# EAGLE board CT_schematic (EAGLE 7.6.0)

Size 100 x 80 mm. Coordinates in mm from the lower left corner, seen from the top.
Outline: 0,0 100,0 100,80 0,80 0,0
Copper layers (1*16): Top 0.035mm / dielectric 1.5mm / Bottom 0.035mm
Design rules "default": minimum track width 10mil, minimum drill 24mil, track to track 8mil, track to pad 8mil, pad to pad 8mil, via to via 8mil, smd to smd 8mil, copper to edge 40mil, drill to drill 8mil, minimum pad ring 10mil, minimum via ring 8mil, stop-mask expansion 4mil, vias tented up to drill 0mil, thermal gap 10mil

## Footprints (pad centres in the part's own frame; a part is rotated, then mirrored left to right if it is on the bottom)
C0603 = smd 0.8 x 0.8: 1 -0.762,0; 2 0.762,0
C0402 = smd 0.5 x 0.5: 1 -0.508,0; 2 0.508,0
C1210 = smd 1.2 x 2.5: 1 -1.524,0; 2 1.524,0
EXV-9H = smd 3.505 x 1.676: 1 -2.857,0; 2 2.857,0
L0603 = smd 0.8 x 0.8: 1 -0.762,0; 2 0.762,0
PJ-037B_PACKAGE = drill 3.7 square: 1 12,0 | drill 3.2 square: 2 6,0
R0603 = smd 0.8 x 0.8: 1 -0.762,0; 2 0.762,0
LQFP100 = smd 0.3 x 1.2: 1 -6,-7.75; 2 -5.5,-7.75; 3 -5,-7.75; 4 -4.5,-7.75; 5 -4,-7.75; 6 -3.5,-7.75; 7 -3,-7.75; 8 -2.5,-7.75; 9 -2,-7.75; 10 -1.5,-7.75; 11 -1,-7.75; 12 -0.5,-7.75; 13 0,-7.75; 14 0.5,-7.75; 15 1,-7.75; 16 1.5,-7.75; 17 2,-7.75; 18 2.5,-7.75; 19 3,-7.75; 20 3.5,-7.75; 21 4,-7.75; 22 4.5,-7.75; 23 5,-7.75; 24 5.5,-7.75; 25 6,-7.75; 51 6,7.75; 52 5.5,7.75; 53 5,7.75; 54 4.5,7.75; 55 4,7.75; 56 3.5,7.75; 57 3,7.75; 58 2.5,7.75; 59 2,7.75; 60 1.5,7.75; 61 1,7.75; 62 0.5,7.75; 63 0,7.75; 64 -0.5,7.75; 65 -1,7.75; 66 -1.5,7.75; 67 -2,7.75; 68 -2.5,7.75; 69 -3,7.75; 70 -3.5,7.75; 71 -4,7.75; 72 -4.5,7.75; 73 -5,7.75; 74 -5.5,7.75; 75 -6,7.75 | smd 1.2 x 0.3: 26 7.75,-6; 27 7.75,-5.5; 28 7.75,-5; 29 7.75,-4.5; 30 7.75,-4; 31 7.75,-3.5; 32 7.75,-3; 33 7.75,-2.5; 34 7.75,-2; 35 7.75,-1.5; 36 7.75,-1; 37 7.75,-0.5; 38 7.75,0; 39 7.75,0.5; 40 7.75,1; 41 7.75,1.5; 42 7.75,2; 43 7.75,2.5; 44 7.75,3; 45 7.75,3.5; 46 7.75,4; 47 7.75,4.5; 48 7.75,5; 49 7.75,5.5; 50 7.75,6; 76 -7.75,6; 77 -7.75,5.5; 78 -7.75,5; 79 -7.75,4.5; 80 -7.75,4; 81 -7.75,3.5; 82 -7.75,3; 83 -7.75,2.5; 84 -7.75,2; 85 -7.75,1.5; 86 -7.75,1; 87 -7.75,0.5; 88 -7.75,0; 89 -7.75,-0.5; 90 -7.75,-1; 91 -7.75,-1.5; 92 -7.75,-2; 93 -7.75,-2.5; 94 -7.75,-3; 95 -7.75,-3.5; 96 -7.75,-4; 97 -7.75,-4.5; 98 -7.75,-5; 99 -7.75,-5.5; 100 -7.75,-6
TST-110-05-T-D-RA = drill 1 pad 1.7 square: 1 0,0 | drill 1 pad 1.7: 2 0,2.54; 3 2.54,0; 4 2.54,2.54; 5 5.08,0; 6 5.08,2.54; 7 7.62,0; 8 7.62,2.54; 9 10.16,0; 10 10.16,2.54; 11 12.7,0; 12 12.7,2.54; 13 15.24,0; 14 15.24,2.54; 15 17.78,0; 16 17.78,2.54; 17 20.32,0; 18 20.32,2.54; 19 22.86,0; 20 22.86,2.54
DFN-10 = smd 0.965 x 0.305: 1 -1.321,1; 2 -1.321,0.5; 3 -1.321,0; 4 -1.321,-0.5; 5 -1.321,-1; 6 1.321,-1; 7 1.321,-0.5; 8 1.321,0; 9 1.321,0.5; 10 1.321,1
ASEK = smd 1.4 x 1: 1 -1.1,-0.8; 2 1.1,-0.8; 3 1.1,0.8; 4 -1.1,0.8
ASFL1 = smd 1.7 x 1.5: 1 -1.27,-1.1; 2 1.27,-1.1; 3 1.27,1.1; 4 -1.27,1.1
SOIC-8_EP = smd 1.6 x 0.533: 1 -2.921,1.905; 2 -2.921,0.635; 3 -2.921,-0.635; 4 -2.921,-1.905; 5 2.921,-1.905; 6 2.921,-0.635; 7 2.921,0.635; 8 2.921,1.905 | smd 2.54 x 3.302: EPAD 0,0 | drill 0.406 pad 0.406: P$1 -0.508,0.635; P$2 0.381,0.635; P$3 -0.508,-0.635; P$4 0.381,-0.635
SON-6 = smd 0.55 x 0.3: 1 -0.355,0.5 | smd 0.52 x 0.3: 2 -0.37,0; 3 -0.37,-0.5; 4 0.37,-0.5; 5 0.37,0; 6 0.37,0.5
SW_4-1437565-2 = smd 1.4 x 2.1: 1 -2.23,4.55; 2 -2.23,-4.55; 3 2.23,4.55; 4 2.23,-4.55
LGM67K-G1J2-24-Z = smd 0.8 x 1.4: A -2,0; C 0,0
NC7SZ125M5X = smd 1.3 x 0.7: 1 -1.3,0.95; 2 -1.3,0; 3 -1.3,-0.95; 4 1.3,-0.95; 5 1.3,0.95
DUMMY_PACKAGE_121 = drill 0.3: 1 0,-1; 2 1.5,-1; 3 3,-1

## Placement (x,y rotation side)
C1  1e-06  [C0603]  -15.24,60.96 0 top  (outside the outline)
C2  1e-07  [C0603]  -19.05,60.96 0 top  (outside the outline)
C3  1e-07  [C0603]  -22.86,60.96 0 top  (outside the outline)
C4  1e-07  [C0603]  -26.67,60.96 0 top  (outside the outline)
C5  1e-07  [C0603]  -30.48,60.96 0 top  (outside the outline)
C6  1e-07  [C0603]  -34.29,60.96 0 top  (outside the outline)
C7  1e-07  [C0603]  -38.1,60.96 0 top  (outside the outline)
C8  4.7e-06  [C0603]  -53.34,55.88 0 top  (outside the outline)
C9  2.2e-06  [C0603]  -57.15,55.88 0 top  (outside the outline)
C10  2.2e-06  [C0603]  -60.96,55.88 0 top  (outside the outline)
C11  1e-08  [C0603]  -41.91,60.96 0 top  (outside the outline)
C12  1e-06  [C0603]  -45.72,60.96 0 top  (outside the outline)
C13  1e-07  [C0402]  -38.1,66.04 0 top  (outside the outline)
C14  1e-07  [C0402]  -41.91,66.04 0 top  (outside the outline)
C15  1e-07  [C0402]  -45.72,66.04 0 top  (outside the outline)
C16  1e-06  [C0603]  -49.53,60.96 0 top  (outside the outline)
C17  1e-07  [C0402]  -49.53,66.04 0 top  (outside the outline)
C18  1e-07  [C0402]  -53.34,66.04 0 top  (outside the outline)
C19  1e-08  [C0402]  -57.15,66.04 0 top  (outside the outline)
C20  1e-08  [C0402]  -60.96,66.04 0 top  (outside the outline)
C21  1e-05  [C1210]  -29.21,49.53 0 top  (outside the outline)
C22  1e-05  [C1210]  -35.56,49.53 0 top  (outside the outline)
C23  1e-05  [C1210]  -41.91,49.53 0 top  (outside the outline)
C24  1e-05  [C1210]  -48.26,49.53 0 top  (outside the outline)
C25  1e-07  [C0402]  -15.24,71.12 0 top  (outside the outline)
C26  0.0001  [EXV-9H]  -38.1,41.91 0 top  (outside the outline)
C27  0.0001  [EXV-9H]  -49.53,41.91 0 top  (outside the outline)
C28  1e-08  [C0402]  -19.05,71.12 0 top  (outside the outline)
C29  1e-08  [C0402]  -22.86,71.12 0 top  (outside the outline)
F1  240.0  [L0603]  -53.34,60.96 0 top  (outside the outline)
J1  PJ-037B  [PJ-037B_PACKAGE]  -48.26,7.62 0 top  (outside the outline)
R2  1000.0  [R0603]  -57.15,60.96 0 top  (outside the outline)
R4  4700.0  [R0603]  -60.96,60.96 0 top  (outside the outline)
R5  2200.0  [R0603]  -15.24,66.04 0 top  (outside the outline)
R6  2200.0  [R0603]  -19.05,66.04 0 top  (outside the outline)
R7  10000.0  [R0603]  -34.29,55.88 0 top  (outside the outline)
R8  10000.0  [R0603]  -39.37,55.88 0 top  (outside the outline)
R9  4031.5447154472  [R0603]  -19.05,55.88 0 top  (outside the outline)
R10  2200.0  [R0603]  -22.86,66.04 0 top  (outside the outline)
R11  10000.0  [R0603]  -44.45,55.88 0 top  (outside the outline)
R12  10000.0  [R0603]  -49.53,55.88 0 top  (outside the outline)
R13  9100.0  [R0603]  -26.67,66.04 0 top  (outside the outline)
R14  680000.0  [R0603]  -24.13,55.88 0 top  (outside the outline)
R15  120000.0  [R0603]  -29.21,55.88 0 top  (outside the outline)
U1  STM32F411VCT6  [LQFP100]  -24.13,8.89 0 top  (outside the outline)
U2  TST-110-05-T-D-RA  [TST-110-05-T-D-RA]  -46.99,31.75 0 top  (outside the outline)
U3  MAG3110FCR1  [DFN-10]  -31.75,66.04 0 top  (outside the outline)
U4  ASEK-32.768KHz-ECST  [ASEK]  -29.21,41.91 0 top  (outside the outline)
U5  ASFL1-25MHZ-NCS  [ASFL1]  -45.72,22.86 0 top  (outside the outline)
U6  MIC5234YME  [SOIC-8_EP]  -59.69,40.64 0 top  (outside the outline)
U7  TPS3895ADRYR  [SON-6]  -31.75,69.85 0 top  (outside the outline)
U8  4-1437565-2  [SW_4-1437565-2]  -27.94,24.13 0 top  (outside the outline)
U9  Q65110A2395  [LGM67K-G1J2-24-Z]  -17.78,49.53 0 top  (outside the outline)
U10  nc7sz125m5x  [NC7SZ125M5X]  -53.34,48.26 0 top  (outside the outline)
U11  nc7sz125m5x  [NC7SZ125M5X]  -59.69,48.26 0 top  (outside the outline)
U12  Dummy  [DUMMY_PACKAGE_121]  -29.21,71.12 0 top  (outside the outline)

## Library data of the parts
C1-C29 F1 J1 R2 R4-R15 U1-U12 = circuit_tree

## Nets
CLK_U1_8: U1.8 U4.3
CLK_U1_12: U1.12 U5.3
GND: C1.2 C2.2 C3.2 C4.2 C5.2 C6.2 C7.2 C8.2 C9.2 C10.2 C11.2 C12.2 C13.2 C14.2 C15.2 C16.2 C17.2 C18.2 C19.2 C20.2 C21.2 C22.2 C23.2 C24.2 C25.2 C26.2 C27.2 C28.2 C29.2 J1.2 R2.2 R7.2 R10.2 R13.2 R15.2 U1.10 U1.20 U1.27 U1.49 U1.74 U1.99 U2.4 U2.6 U2.8 U2.10 U2.12 U2.14 U2.16 U2.18 U2.20 U3.5 U3.10 U4.2 U5.2 U6.7 U6.EPAD U7.2 U9.C U10.2 U10.3 U11.1 U11.3 U12.1
NET_U1_14: R4.1 U1.14 U11.4
NET_U1_22: C11.1 C12.1 F1.1 U1.21 U1.22
NET_U1_48: C9.1 U1.48
NET_U1_73: C10.1 U1.73
NET_U1_92: R5.1 U1.92 U3.7
NET_U1_93: R6.1 U1.93 U3.6
NET_U1_94: R7.1 U1.94
NET_U1_97: U9.A
NET_U1_98: U8.3 U8.4
NET_U3_1: C14.1 U3.1
NET_U3_4: C17.1 U3.4
NET_U6_4: R9.2 R10.1 U6.4
NET_U7_1: R12.1 R13.1 U7.1
NET_U7_3: R14.2 R15.1 U7.3
NET_U7_4: R11.1 U7.4 U10.4 U11.2
NET_U8_1: R2.1 U8.1 U8.2
PROC_ADC1_IN1: U1.24 U12.3
PROC_ADC1_IN2: U1.25 U12.2
PROC_SYS_JTCK_SWCLK: U1.76 U2.9
PROC_SYS_JTDO_SWO: U1.89 U2.13
PROC_SYS_JTMS_SWDIO: U1.72 U2.7
RST_OUT_U2_SRESET_B: R8.1 U2.15 U10.1
VCC_S1_12V8: C21.1 C22.1 C26.1 C27.1 J1.1 U6.5 U6.8
VCC_TIER1_3V3: C1.1 C2.1 C3.1 C4.1 C5.1 C6.1 C7.1 C8.1 C13.1 C15.1 C16.1 C18.1 C19.1 C20.1 C23.1 C24.1 C25.1 C28.1 C29.1 F1.2 R4.2 R5.2 R6.2 R8.2 R9.1 R11.2 R12.2 R14.1 U1.6 U1.11 U1.19 U1.28 U1.50 U1.75 U1.100 U2.1 U3.2 U3.8 U4.4 U5.4 U6.1 U7.6 U10.5 U11.5

## Tracks (layer width: path | path; a pad name or v marks a point on that pad's centre or on a via)
CLK_U1_8  (1 unrouted)
CLK_U1_12  (1 unrouted)
GND  (62 unrouted)
NET_U1_14  (2 unrouted)
NET_U1_22  (4 unrouted)
NET_U1_48  (1 unrouted)
NET_U1_73  (1 unrouted)
NET_U1_92  (2 unrouted)
NET_U1_93  (2 unrouted)
NET_U1_94  (1 unrouted)
NET_U1_98  (1 unrouted)
NET_U3_1  (1 unrouted)
NET_U3_4  (1 unrouted)
NET_U6_4  (2 unrouted)
NET_U7_1  (2 unrouted)
NET_U7_3  (2 unrouted)
NET_U7_4  (3 unrouted)
NET_U8_1  (2 unrouted)
PROC_ADC1_IN1  (1 unrouted)
PROC_ADC1_IN2  (1 unrouted)
PROC_SYS_JTCK_SWCLK  (1 unrouted)
PROC_SYS_JTDO_SWO  (1 unrouted)
PROC_SYS_JTMS_SWDIO  (1 unrouted)
RST_OUT_U2_SRESET_B  (2 unrouted)
VCC_S1_12V8  (6 unrouted)
VCC_TIER1_3V3  (43 unrouted)